# EAGLE board CT_schematic (EAGLE 7.6.0)

Size 100 x 80 mm. Coordinates in mm from the lower left corner, seen from the top.
Outline: 0,0 100,0 100,80 0,80 0,0
Copper layers (1*16): Top 0.035mm / dielectric 1.5mm / Bottom 0.035mm
Design rules "default": minimum track width 10mil, minimum drill 24mil, track to track 8mil, track to pad 8mil, pad to pad 8mil, via to via 8mil, smd to smd 8mil, copper to edge 40mil, drill to drill 8mil, minimum pad ring 10mil, minimum via ring 8mil, stop-mask expansion 4mil, vias tented up to drill 0mil, thermal gap 10mil

## Footprints (pad centres in the part's own frame; a part is rotated, then mirrored left to right if it is on the bottom)
C0603 = smd 0.8 x 0.8: 1 -0.762,0; 2 0.762,0
C0402 = smd 0.5 x 0.5: 1 -0.508,0; 2 0.508,0
R0603 = smd 0.8 x 0.8: 1 -0.762,0; 2 0.762,0
C0805 = smd 1.2 x 1.3: 1 -1.016,0; 2 1.016,0
2220 = smd 1.85 x 5.5: 1 -2.55,0; 2 2.55,0
EXV-9H = smd 3.505 x 1.676: 1 -2.857,0; 2 2.857,0
L0603 = smd 0.8 x 0.8: 1 -0.762,0; 2 0.762,0
DR1040 = smd 1.6 x 3.2: 1 -4.458,0; 2 4.458,0
PJ-037B_PACKAGE = drill 3.7 square: 1 12,0 | drill 3.2 square: 2 6,0
LQFP176 = smd 0.3 x 1.2: 1 -10.75,-12.75; 2 -10.25,-12.75; 3 -9.75,-12.75; 4 -9.25,-12.75; 5 -8.75,-12.75; 6 -8.25,-12.75; 7 -7.75,-12.75; 8 -7.25,-12.75; 9 -6.75,-12.75; 10 -6.25,-12.75; 11 -5.75,-12.75; 12 -5.25,-12.75; 13 -4.75,-12.75; 14 -4.25,-12.75; 15 -3.75,-12.75; 16 -3.25,-12.75; 17 -2.75,-12.75; 18 -2.25,-12.75; 19 -1.75,-12.75; 20 -1.25,-12.75; 21 -0.75,-12.75; 22 -0.25,-12.75; 23 0.25,-12.75; 24 0.75,-12.75; 25 1.25,-12.75; 26 1.75,-12.75; 27 2.25,-12.75; 28 2.75,-12.75; 29 3.25,-12.75; 30 3.75,-12.75; 31 4.25,-12.75; 32 4.75,-12.75; 33 5.25,-12.75; 34 5.75,-12.75; 35 6.25,-12.75; 36 6.75,-12.75; 37 7.25,-12.75; 38 7.75,-12.75; 39 8.25,-12.75; 40 8.75,-12.75; 41 9.25,-12.75; 42 9.75,-12.75; 43 10.25,-12.75; 44 10.75,-12.75; 89 10.75,12.75; 90 10.25,12.75; 91 9.75,12.75; 92 9.25,12.75; 93 8.75,12.75; 94 8.25,12.75; 95 7.75,12.75; 96 7.25,12.75; 97 6.75,12.75; 98 6.25,12.75; 99 5.75,12.75; 100 5.25,12.75; 101 4.75,12.75; 102 4.25,12.75; 103 3.75,12.75; 104 3.25,12.75; 105 2.75,12.75; 106 2.25,12.75; 107 1.75,12.75; 108 1.25,12.75; 109 0.75,12.75; 110 0.25,12.75; 111 -0.25,12.75; 112 -0.75,12.75; 113 -1.25,12.75; 114 -1.75,12.75; 115 -2.25,12.75; 116 -2.75,12.75; 117 -3.25,12.75; 118 -3.75,12.75; 119 -4.25,12.75; 120 -4.75,12.75; 121 -5.25,12.75; 122 -5.75,12.75; 123 -6.25,12.75; 124 -6.75,12.75; 125 -7.25,12.75; 126 -7.75,12.75; 127 -8.25,12.75; 128 -8.75,12.75; 129 -9.25,12.75; 130 -9.75,12.75; 131 -10.25,12.75; 132 -10.75,12.75 | smd 1.2 x 0.3: 45 12.75,-10.75; 46 12.75,-10.25; 47 12.75,-9.75; 48 12.75,-9.25; 49 12.75,-8.75; 50 12.75,-8.25; 51 12.75,-7.75; 52 12.75,-7.25; 53 12.75,-6.75; 54 12.75,-6.25; 55 12.75,-5.75; 56 12.75,-5.25; 57 12.75,-4.75; 58 12.75,-4.25; 59 12.75,-3.75; 60 12.75,-3.25; 61 12.75,-2.75; 62 12.75,-2.25; 63 12.75,-1.75; 64 12.75,-1.25; 65 12.75,-0.75; 66 12.75,-0.25; 67 12.75,0.25; 68 12.75,0.75; 69 12.75,1.25; 70 12.75,1.75; 71 12.75,2.25; 72 12.75,2.75; 73 12.75,3.25; 74 12.75,3.75; 75 12.75,4.25; 76 12.75,4.75; 77 12.75,5.25; 78 12.75,5.75; 79 12.75,6.25; 80 12.75,6.75; 81 12.75,7.25; 82 12.75,7.75; 83 12.75,8.25; 84 12.75,8.75; 85 12.75,9.25; 86 12.75,9.75; 87 12.75,10.25; 88 12.75,10.75; 133 -12.75,10.75; 134 -12.75,10.25; 135 -12.75,9.75; 136 -12.75,9.25; 137 -12.75,8.75; 138 -12.75,8.25; 139 -12.75,7.75; 140 -12.75,7.25; 141 -12.75,6.75; 142 -12.75,6.25; 143 -12.75,5.75; 144 -12.75,5.25; 145 -12.75,4.75; 146 -12.75,4.25; 147 -12.75,3.75; 148 -12.75,3.25; 149 -12.75,2.75; 150 -12.75,2.25; 151 -12.75,1.75; 152 -12.75,1.25; 153 -12.75,0.75; 154 -12.75,0.25; 155 -12.75,-0.25; 156 -12.75,-0.75; 157 -12.75,-1.25; 158 -12.75,-1.75; 159 -12.75,-2.25; 160 -12.75,-2.75; 161 -12.75,-3.25; 162 -12.75,-3.75; 163 -12.75,-4.25; 164 -12.75,-4.75; 165 -12.75,-5.25; 166 -12.75,-5.75; 167 -12.75,-6.25; 168 -12.75,-6.75; 169 -12.75,-7.25; 170 -12.75,-7.75; 171 -12.75,-8.25; 172 -12.75,-8.75; 173 -12.75,-9.25; 174 -12.75,-9.75; 175 -12.75,-10.25; 176 -12.75,-10.75
SOT-23-6 = smd 1.1 x 0.6: 1 -1.4,0.95; 2 -1.4,0; 3 -1.4,-0.95; 4 1.4,-0.95; 5 1.4,0; 6 1.4,0.95
ARDUCAM = drill 1 pad 1.8 square: 1 0,0 | drill 1 pad 1.8: 2 0,2.54; 3 2.54,0; 4 2.54,2.54; 5 5.08,0; 6 5.08,2.54; 7 7.62,0; 8 7.62,2.54; 9 10.16,0; 10 10.16,2.54; 11 12.7,0; 12 12.7,2.54; 13 15.24,0; 14 15.24,2.54; 15 17.78,0; 16 17.78,2.54; 17 20.32,0; 18 20.32,2.54; 19 22.86,0; 20 22.86,2.54
VFBGA-63 = smd 0.4 x 0.4: A1 -3.6,4.4; A2 -2.8,4.4; A9 2.8,4.4; A10 3.6,4.4; B1 -3.6,3.6; B9 2.8,3.6; B10 3.6,3.6; C3 -2,2.8; C4 -1.2,2.8; C5 -0.4,2.8; C6 0.4,2.8; C7 1.2,2.8; C8 2,2.8; D3 -2,2; D4 -1.2,2; D5 -0.4,2; D6 0.4,2; D7 1.2,2; D8 2,2; E3 -2,1.2; E4 -1.2,1.2; E5 -0.4,1.2; E6 0.4,1.2; E7 1.2,1.2; E8 2,1.2; F3 -2,0.4; F4 -1.2,0.4; F5 -0.4,0.4; F6 0.4,0.4; F7 1.2,0.4; F8 2,0.4; G3 -2,-0.4; G4 -1.2,-0.4; G5 -0.4,-0.4; G6 0.4,-0.4; G7 1.2,-0.4; G8 2,-0.4; H3 -2,-1.2; H4 -1.2,-1.2; H5 -0.4,-1.2; H6 0.4,-1.2; H7 1.2,-1.2; H8 2,-1.2; J3 -2,-2; J4 -1.2,-2; J5 -0.4,-2; J6 0.4,-2; J7 1.2,-2; J8 2,-2; K3 -2,-2.8; K4 -1.2,-2.8; K5 -0.4,-2.8; K6 0.4,-2.8; K7 1.2,-2.8; K8 2,-2.8; L1 -3.6,-3.6; L2 -2.8,-3.6; L9 2.8,-3.6; L10 3.6,-3.6; M1 -3.6,-4.4; M2 -2.8,-4.4; M9 2.8,-4.4; M10 3.6,-4.4
SON-8 = smd 0.35 x 0.85: 1 -0.975,-1.475; 2 -0.325,-1.475; 3 0.325,-1.475; 4 0.975,-1.475; 5 0.975,1.475; 6 0.325,1.475; 7 -0.325,1.475; 8 -0.975,1.475 | smd 2.4 x 1.65: PAD 0,0
SOIC-8 = smd 1.6 x 0.6: 1 -2.7,1.905 | smd 1.55 x 0.6: 2 -2.7,0.635; 3 -2.7,-0.635; 4 -2.7,-1.905; 5 2.7,-1.905; 6 2.7,-0.635; 7 2.7,0.635; 8 2.7,1.905
182-009-MALE = drill 1.194 pad 1.524 octagon: 1 -5.537,10.923; 2 -2.769,10.923; 3 0,10.923; 4 2.769,10.923; 5 5.537,10.923; 6 -4.153,8.08; 7 -1.384,8.08; 8 1.384,8.08; 9 4.153,8.08 | hole 3.048: -12.446,9.501; 12.446,9.501
MICRO_USB_AB = smd 0.4 x 1.35: 1 1.3,0.26; 2 0.65,0.26; 3 0,0.26; 4 -0.65,0.26; 5 -1.3,0.26 | drill 0.6 pad 0.95 long: 6 4.175,-2.54; 7 -4.175,-2.54 | drill 0.7 pad 1.1 long: 8 -2.225,0.46; 9 2.225,0.46
SOT143B = smd 1 x 0.7: 1 -0.75,-1 | smd 0.6 x 0.7: 2 0.95,-1; 3 0.95,1; 4 -0.95,1
QFN-24 = smd 0.7 x 0.305: 1 -1.815,1.25; 2 -1.815,0.75; 3 -1.815,0.25; 4 -1.815,-0.25; 5 -1.815,-0.73; 6 -1.815,-1.25; 13 1.815,-1.25; 14 1.815,-0.75; 15 1.815,-0.25; 16 1.815,0.25; 17 1.815,0.75; 18 1.815,1.25 | smd 0.305 x 0.7: 7 -1.25,-1.815; 8 -0.75,-1.815; 9 -0.25,-1.815; 10 0.25,-1.815; 11 0.75,-1.815; 12 1.25,-1.815; 19 1.25,1.815; 20 0.75,1.815; 21 0.25,1.815; 22 -0.25,1.815; 23 -0.75,1.815; 24 -1.25,1.815 | smd 2.591 x 2.591: 25 0,0
USB-A-H = drill 0.914: 1 2.718,3.493; 2 2.718,1.003; 3 2.718,-1.003; 4 2.718,-3.493 | drill 2.311: 5 0,-6.566; 6 0,6.566
ABS07-32.768KHZ-7-T = smd 1.1 x 2.4: 1 -2.5,0; 2 0,0
ASEK = smd 1.4 x 1: 1 -1.1,-0.8; 2 1.1,-0.8; 3 1.1,0.8; 4 -1.1,0.8
ASFL1 = smd 1.7 x 1.5: 1 -1.27,-1.1; 2 1.27,-1.1; 3 1.27,1.1; 4 -1.27,1.1
IDT74FCT38072 = smd 0.51 x 1: 1 0,0; 2 1.27,0; 3 2.54,0; 4 3.81,0; 5 3.81,4.95; 6 2.54,4.95; 7 1.27,4.95; 8 0,4.95
WSON-8 = smd 0.3 x 0.6: 1 -0.75,0; 2 0.05,0; 3 0.85,0; 4 1.65,0; 5 1.65,3.8; 6 0.85,3.8; 7 0.05,3.8; 8 -0.75,3.8 | smd 3 x 2.6: PAD 0.45,1.9
QFN-16_EP = smd 0.805 x 0.3: 1 -1.452,0.75; 2 -1.452,0.25; 3 -1.452,-0.25; 4 -1.452,-0.75; 9 1.452,-0.75; 10 1.452,-0.25; 11 1.452,0.25; 12 1.452,0.75 | smd 0.3 x 0.805: 5 -0.75,-1.452; 6 -0.25,-1.452; 7 0.25,-1.452; 8 0.75,-1.452; 13 0.75,1.452; 14 0.25,1.452; 15 -0.25,1.452; 16 -0.75,1.452 | smd 1.55 x 1.55: 17 0,0
SON-6 = smd 0.55 x 0.3: 1 -0.355,0.5 | smd 0.52 x 0.3: 2 -0.37,0; 3 -0.37,-0.5; 4 0.37,-0.5; 5 0.37,0; 6 0.37,0.5
SW_4-1437565-2 = smd 1.4 x 2.1: 1 -2.23,4.55; 2 -2.23,-4.55; 3 2.23,4.55; 4 2.23,-4.55
LGM67K-G1J2-24-Z = smd 0.8 x 1.4: A -2,0; C 0,0
NC7SZ125M5X = smd 1.3 x 0.7: 1 -1.3,0.95; 2 -1.3,0; 3 -1.3,-0.95; 4 1.3,-0.95; 5 1.3,0.95

## Placement (x,y rotation side)
C1  1e-06  [C0603]  -83.82,88.9 0 top  (outside the outline)
C2  1e-07  [C0603]  -87.63,88.9 0 top  (outside the outline)
C3  1e-07  [C0603]  -91.44,88.9 0 top  (outside the outline)
C4  1e-07  [C0603]  -15.24,93.98 0 top  (outside the outline)
C5  1e-07  [C0603]  -19.05,93.98 0 top  (outside the outline)
C6  1e-07  [C0603]  -22.86,93.98 0 top  (outside the outline)
C7  1e-07  [C0603]  -26.67,93.98 0 top  (outside the outline)
C8  1e-07  [C0603]  -30.48,93.98 0 top  (outside the outline)
C9  1e-07  [C0603]  -34.29,93.98 0 top  (outside the outline)
C10  1e-07  [C0603]  -38.1,93.98 0 top  (outside the outline)
C11  1e-07  [C0603]  -41.91,93.98 0 top  (outside the outline)
C12  1e-07  [C0603]  -45.72,93.98 0 top  (outside the outline)
C13  1e-07  [C0603]  -49.53,93.98 0 top  (outside the outline)
C14  1e-07  [C0603]  -53.34,93.98 0 top  (outside the outline)
C15  1e-07  [C0603]  -57.15,93.98 0 top  (outside the outline)
C16  1e-07  [C0603]  -60.96,93.98 0 top  (outside the outline)
C17  1e-07  [C0603]  -64.77,93.98 0 top  (outside the outline)
C18  4.7e-06  [C0603]  -64.77,88.9 0 top  (outside the outline)
C19  1e-08  [C0603]  -68.58,93.98 0 top  (outside the outline)
C20  1e-06  [C0603]  -72.39,93.98 0 top  (outside the outline)
C21  2.2e-06  [C0603]  -68.58,88.9 0 top  (outside the outline)
C22  2.2e-06  [C0603]  -72.39,88.9 0 top  (outside the outline)
C23  1e-06  [C0603]  -76.2,93.98 0 top  (outside the outline)
C24  1e-07  [C0402]  -67.31,99.06 0 top  (outside the outline)
C25  1e-07  [C0402]  -71.12,99.06 0 top  (outside the outline)
C26  1e-07  [C0402]  -74.93,99.06 0 top  (outside the outline)
C27  1e-07  [C0402]  -78.74,99.06 0 top  (outside the outline)
C28  2.2e-06  [C0603]  -76.2,88.9 0 top  (outside the outline)
C29  1e-07  [C0402]  -82.55,99.06 0 top  (outside the outline)
C30  1e-07  [C0402]  -86.36,99.06 0 top  (outside the outline)
C31  1e-08  [C0402]  -90.17,99.06 0 top  (outside the outline)
C32  2.2e-06  [C0603]  -80.01,88.9 0 top  (outside the outline)
C33  1e-08  [C0402]  -93.98,99.06 0 top  (outside the outline)
C34  1e-08  [C0402]  -15.24,104.14 0 top  (outside the outline)
C35  0.0001  [R0603]  -80.01,93.98 0 top  (outside the outline)
C36  1e-08  [C0402]  -19.05,104.14 0 top  (outside the outline)
C37  1e-08  [C0402]  -22.86,104.14 0 top  (outside the outline)
C38  1e-08  [C0402]  -26.67,104.14 0 top  (outside the outline)
C39  1e-08  [C0402]  -30.48,104.14 0 top  (outside the outline)
C40  1e-06  [C0603]  -83.82,93.98 0 top  (outside the outline)
C41  1e-05  [C0805]  -69.85,76.2 0 top  (outside the outline)
C42  1e-05  [C0805]  -74.93,76.2 0 top  (outside the outline)
C43  1e-06  [C0603]  -87.63,93.98 0 top  (outside the outline)
C44  1e-07  [C0402]  -34.29,104.14 0 top  (outside the outline)
C45  6.8e-05  [2220]  -54.61,50.8 0 top  (outside the outline)
C46  1e-05  [C0805]  -80.01,76.2 0 top  (outside the outline)
C47  1e-06  [C0603]  -91.44,93.98 0 top  (outside the outline)
C48  1e-07  [C0402]  -38.1,104.14 0 top  (outside the outline)
C49  6.8e-05  [2220]  -62.23,50.8 0 top  (outside the outline)
C50  1e-07  [C0402]  -41.91,104.14 0 top  (outside the outline)
C51  0.0001  [EXV-9H]  -17.78,69.85 0 top  (outside the outline)
C52  0.0001  [EXV-9H]  -29.21,69.85 0 top  (outside the outline)
C53  1e-08  [C0402]  -45.72,104.14 0 top  (outside the outline)
C54  1e-08  [C0402]  -49.53,104.14 0 top  (outside the outline)
C55  1e-08  [C0402]  -53.34,104.14 0 top  (outside the outline)
F1  240.0  [L0603]  -15.24,99.06 0 top  (outside the outline)
I1  2.5e-06  [DR1040]  -19.05,50.8 0 top  (outside the outline)
I2  2.5e-06  [DR1040]  -30.48,50.8 0 top  (outside the outline)
J1  PJ-037B  [PJ-037B_PACKAGE]  -44.45,34.29 0 top  (outside the outline)
R2  1000.0  [R0603]  -19.05,99.06 0 top  (outside the outline)
R7  4700.0  [R0603]  -22.86,99.06 0 top  (outside the outline)
R8  4700.0  [R0603]  -26.67,99.06 0 top  (outside the outline)
R9  4700.0  [R0603]  -30.48,99.06 0 top  (outside the outline)
R10  2200.0  [R0603]  -34.29,99.06 0 top  (outside the outline)
R12  2200.0  [R0603]  -38.1,99.06 0 top  (outside the outline)
R14  47000.0  [R0603]  -45.72,83.82 0 top  (outside the outline)
R15  10000.0  [R0603]  -50.8,83.82 0 top  (outside the outline)
R16  10000.0  [R0603]  -55.88,83.82 0 top  (outside the outline)
R17  10000.0  [R0603]  -60.96,83.82 0 top  (outside the outline)
R18  10000.0  [R0603]  -66.04,83.82 0 top  (outside the outline)
R19  10000.0  [R0603]  -71.12,83.82 0 top  (outside the outline)
R20  10000.0  [R0603]  -76.2,83.82 0 top  (outside the outline)
R21  10000.0  [R0603]  -81.28,83.82 0 top  (outside the outline)
R22  10000.0  [R0603]  -86.36,83.82 0 top  (outside the outline)
R23  10000.0  [R0603]  -91.44,83.82 0 top  (outside the outline)
R24  10000.0  [R0603]  -15.24,88.9 0 top  (outside the outline)
R25  10000.0  [R0603]  -20.32,88.9 0 top  (outside the outline)
R26  10000.0  [R0603]  -25.4,88.9 0 top  (outside the outline)
R27  120.0  [R0603]  -41.91,99.06 0 top  (outside the outline)
R28  470000.0  [R0603]  -85.09,76.2 0 top  (outside the outline)
R29  47000.0  [R0603]  -30.48,88.9 0 top  (outside the outline)
R30  8060.0  [R0603]  -45.72,99.06 0 top  (outside the outline)
R31  100000.0  [R0603]  -90.17,76.2 0 top  (outside the outline)
R32  36000.0  [R0603]  -35.56,88.9 0 top  (outside the outline)
R33  100000.0  [R0603]  -15.24,83.82 0 top  (outside the outline)
R34  20000.0  [R0603]  -40.64,88.9 0 top  (outside the outline)
R35  91000.0  [R0603]  -45.72,88.9 0 top  (outside the outline)
R36  300000.0  [R0603]  -20.32,83.82 0 top  (outside the outline)
R37  20000.0  [R0603]  -50.8,88.9 0 top  (outside the outline)
R38  150000.0  [R0603]  -25.4,83.82 0 top  (outside the outline)
R39  300000.0  [R0603]  -30.48,83.82 0 top  (outside the outline)
R40  10000.0  [R0603]  -55.88,88.9 0 top  (outside the outline)
R41  10000.0  [R0603]  -60.96,88.9 0 top  (outside the outline)
R42  9100.0  [R0603]  -49.53,99.06 0 top  (outside the outline)
R43  680000.0  [R0603]  -35.56,83.82 0 top  (outside the outline)
R44  120000.0  [R0603]  -40.64,83.82 0 top  (outside the outline)
U1  STM32F439IGT6  [LQFP176]  -26.67,13.97 0 top  (outside the outline)
U2  MAX4995AAUT+T  [SOT-23-6]  -45.72,76.2 0 top  (outside the outline)
U3  arducam_ov2640  [ARDUCAM]  -82.55,67.31 0 top  (outside the outline)
U4  mt29f4g08abadah4  [VFBGA-63]  -50.8,34.29 0 top  (outside the outline)
U5  PCF85063TP/1Z  [SON-8]  -27.94,76.2 0 top  (outside the outline)
U6  SN65HVD230D  [SOIC-8]  -45.72,50.8 0 top  (outside the outline)
U7  182-009-113R531  [182-009-MALE]  -63.5,6.35 0 top  (outside the outline)
U8  47590-0001  [MICRO_USB_AB]  -63.5,35.56 0 top  (outside the outline)
U9  prtr5v0u2ax  [SOT143B]  -66.04,104.14 0 top  (outside the outline)
U10  USB3317C-CP-TR  [QFN-24]  -33.02,77.47 0 top  (outside the outline)
U11  61400416021  [USB-A-H]  -19.05,36.83 0 top  (outside the outline)
U12  prtr5v0u2ax  [SOT143B]  -78.74,104.14 0 top  (outside the outline)
U13  MAX4995AAUT+T  [SOT-23-6]  -40.64,76.2 0 top  (outside the outline)
U14  ABS07-32.768KHZ-7-T  [ABS07-32.768KHZ-7-T]  -50.8,69.85 0 top  (outside the outline)
U15  ASEK-32.768KHz-ECST  [ASEK]  -81.28,60.96 0 top  (outside the outline)
U16  ASFL1-25MHZ-NCS  [ASFL1]  -26.67,60.96 0 top  (outside the outline)
U17  idt74fct38072  [IDT74FCT38072]  -63.5,58.42 0 top  (outside the outline)
U18  ASFL1-26MHZ-NCS  [ASFL1]  -43.18,60.96 0 top  (outside the outline)
U19  LP2951ACSDX/NOPB  [WSON-8]  -81.28,48.26 0 top  (outside the outline)
U20  LTC3601EUD#PBF  [QFN-16_EP]  -54.61,99.06 0 top  (outside the outline)
U21  LTC3601EUD#PBF  [QFN-16_EP]  -60.96,99.06 0 top  (outside the outline)
U22  TPS3895ADRYR  [SON-6]  -82.55,102.87 0 top  (outside the outline)
U23  4-1437565-2  [SW_4-1437565-2]  -83.82,34.29 0 top  (outside the outline)
U24  Q65110A2395  [LGM67K-G1J2-24-Z]  -17.78,77.47 0 top  (outside the outline)
U25  nc7sz125m5x  [NC7SZ125M5X]  -50.8,76.2 0 top  (outside the outline)
U26  nc7sz125m5x  [NC7SZ125M5X]  -57.15,76.2 0 top  (outside the outline)
U27  nc7sz125m5x  [NC7SZ125M5X]  -63.5,76.2 0 top  (outside the outline)

## Library data of the parts
C1-C55 F1 I1 I2 J1 R2 R7-R10 R12 R14-R44 U1-U27 = circuit_tree

## Nets
CLK_CRYSTAL_U5_1: U5.1 U14.1
CLK_CRYSTAL_U5_2: U5.2 U14.2
CLK_U1_9: U1.9 U15.3
CLK_U1_29: U1.29 U17.6
CLK_U3_8: U3.8 U17.7
CLK_U10_23: U10.23 U18.3
CLK_U17_3: U16.3 U17.3
GND: C1.2 C2.2 C3.2 C4.2 C5.2 C6.2 C7.2 C8.2 C9.2 C10.2 C11.2 C12.2 C13.2 C14.2 C15.2 C16.2 C17.2 C18.2 C19.2 C20.2 C21.2 C22.2 C23.2 C24.2 C25.2 C26.2 C27.2 C28.2 C29.2 C30.2 C31.2 C32.2 C33.2 C34.2 C35.2 C36.2 C37.2 C38.2 C39.2 C40.2 C41.2 C42.2 C43.2 C45.1 C45.2 C46.2 C47.2 C49.1 C49.2 C50.2 C51.2 C52.2 C53.2 C54.2 C55.2 J1.2 R2.2 R14.2 R18.2 R20.2 R28.2 R29.2 R30.2 R33.2 R34.2 R36.2 R37.2 R39.2 R42.2 R44.2 U1.14 U1.22 U1.37 U1.61 U1.71 U1.90 U1.102 U1.113 U1.126 U1.135 U1.148 U1.158 U2.2 U3.2 U3.20 U4.C5 U4.F7 U4.K3 U4.K8 U5.4 U5.PAD U6.2 U7.5 U8.5 U8.6 U8.7 U8.8 U8.9 U9.1 U10.1 U10.25 U11.4 U11.5 U11.6 U12.1 U13.2 U15.2 U16.2 U17.4 U17.5 U17.8 U18.2 U19.3 U19.4 U19.PAD U20.1 U20.9 U20.17 U21.1 U21.9 U21.17 U22.2 U24.C U25.1 U25.3 U26.1 U26.3 U27.1 U27.3
NET_U1_31: R7.1 U1.31 U25.4
NET_U1_39: C19.1 C20.1 F1.1 U1.38 U1.39
NET_U1_48: R18.1 U1.48
NET_U1_58: R17.1 U1.58
NET_U1_81: C21.1 U1.81
NET_U1_125: C22.1 U1.125
NET_U1_164: R10.1 U1.164 U5.6
NET_U1_165: R12.1 U1.165 U5.5
NET_U1_166: R16.1 U1.166
NET_U1_171: R15.1 U1.171
NET_U1_175: U24.A
NET_U1_176: U23.3 U23.4
NET_U2_3: R14.1 U2.3
NET_U3_19: R8.1 U3.19 U26.4
NET_U4_C3: R25.1 U4.C3
NET_U5_3: R26.1 U5.3
NET_U6_6: R27.2 U6.6
NET_U6_8: R28.1 U6.8
NET_U7_2: R27.2 U6.6 U7.2
NET_U7_3: R27.1 U6.7 U7.3
NET_U10_4: C32.1 U10.4
NET_U10_22: R9.1 U10.22 U27.4
NET_U10_24: R30.1 U10.24
NET_U11_1: C35.1 U10.2 U11.1 U12.4 U13.1
NET_U11_2: U10.5 U11.2 U12.3
NET_U11_3: U10.6 U11.3 U12.2
NET_U13_3: R29.1 U13.3
NET_U13_4: U10.7 U13.4
NET_U19_5: R31.1 U19.5
NET_U19_7: R32.2 R33.1 U19.7
NET_U20_3: C44.2 I1.1 U20.3 U20.4
NET_U20_6: C44.1 U20.6
NET_U20_7: C43.1 U20.7 U20.12
NET_U20_10: R36.1 U20.10
NET_U20_11: R34.1 R35.1 U20.11
NET_U20_14: U20.14
NET_U20_ATNET_3: I1.2 R35.2
NET_U21_3: C48.2 I2.1 U21.3 U21.4
NET_U21_6: C48.1 U21.6
NET_U21_7: C47.1 U21.7 U21.12
NET_U21_10: R39.1 U21.10
NET_U21_11: R37.1 R38.1 U21.11
NET_U21_14: U21.14
NET_U21_ATNET_3: I2.2 R38.2
NET_U22_1: R41.1 R42.1 U22.1
NET_U22_3: R43.2 R44.1 U22.3
NET_U22_4: R40.1 U22.4 U25.2 U26.2 U27.2
NET_U23_1: R2.1 U23.1 U23.2
PROC_CAN1_RX: U1.11 U6.4
PROC_CAN1_TX: U1.128 U6.1
PROC_DCMI_D0: U1.86 U3.18
PROC_DCMI_D1: U1.87 U3.17
PROC_DCMI_D2: U1.88 U3.16
PROC_DCMI_D3: U1.89 U3.15
PROC_DCMI_D4: U1.3 U3.14
PROC_DCMI_D5: U1.145 U3.13
PROC_DCMI_D6: U1.4 U3.12
PROC_DCMI_D7: U1.5 U3.11
PROC_DCMI_D8: U1.83 U3.10
PROC_DCMI_D9: U1.84 U3.9
PROC_DCMI_HSYNC: U1.50 U3.6
PROC_DCMI_PIXCK: U1.52 U3.7
PROC_DCMI_VSYNC: U1.152 U3.5
PROC_FMC_A16: U1.99 U4.D5
PROC_FMC_A17: U1.100 U4.C4
PROC_FMC_D0: U1.104 U4.H4
PROC_FMC_D1: U1.105 U4.J4
PROC_FMC_D2: U1.142 U4.K4
PROC_FMC_D3: U1.143 U4.K5
PROC_FMC_D4: U1.68 U4.K6
PROC_FMC_D5: U1.69 U4.J7
PROC_FMC_D6: U1.70 U4.K7
PROC_FMC_D7: U1.73 U4.J8
PROC_FMC_INT2: R21.1 U1.110 U4.C8
PROC_FMC_NCE2: R22.1 U1.151 U4.C6
PROC_FMC_NOE: R24.1 U1.146 U4.D4
PROC_FMC_NWE: R23.1 U1.147 U4.C7
PROC_GPIO_TO_U1_USB_FAULT: R19.1 U1.2 U2.6
PROC_GPIO_TO_U1_VBUS_EN: R20.1 U1.1 U2.4
PROC_USB_OTG_FS_DM: U8.2 U9.3
PROC_USB_OTG_FS_DP: U8.3 U9.2
PROC_USB_OTG_FS_ID: U8.4
PROC_USB_OTG_FS_VBUS: U2.1 U8.1 U9.4
PROC_USB_OTG_HS_ULPI_CK: U1.51 U10.12
PROC_USB_OTG_HS_ULPI_D0: U1.47 U10.16
PROC_USB_OTG_HS_ULPI_D1: U1.56 U10.15
PROC_USB_OTG_HS_ULPI_D2: U1.57 U10.14
PROC_USB_OTG_HS_ULPI_D3: U1.79 U10.13
PROC_USB_OTG_HS_ULPI_D4: U1.80 U10.11
PROC_USB_OTG_HS_ULPI_D5: U1.92 U10.10
PROC_USB_OTG_HS_ULPI_D6: U1.93 U10.9
PROC_USB_OTG_HS_ULPI_D7: U1.163 U10.8
PROC_USB_OTG_HS_ULPI_DIR: U1.13 U10.19
PROC_USB_OTG_HS_ULPI_NXT: U1.35 U10.18
PROC_USB_OTG_HS_ULPI_STP: U1.32 U10.20
VCC_S1_6V6: C40.1 C42.1 C46.1 C51.1 C52.1 J1.1 U19.8 U20.15 U20.16 U21.15 U21.16
VCC_TIER1_1V8: C34.1 C41.1 C53.1 C54.1 C55.1 R31.2 R32.1 U10.21 U19.1 U25.5 U26.5 U27.5
VCC_TIER1_3V3: C1.1 C2.1 C3.1 C4.1 C5.1 C6.1 C7.1 C8.1 C9.1 C10.1 C11.1 C12.1 C13.1 C14.1 C15.1 C16.1 C17.1 C18.1 C23.1 C24.1 C25.1 C26.1 C27.1 C28.1 C29.1 C30.1 C31.1 C33.1 C36.1 C37.1 C38.1 C39.1 C45.2 C50.1 F1.2 I1.2 R7.2 R8.2 R9.2 R10.2 R12.2 R15.2 R16.2 R17.2 R19.2 R21.2 R22.2 R23.2 R24.2 R25.2 R26.2 R35.2 R40.2 R41.2 R43.1 U1.6 U1.15 U1.23 U1.36 U1.49 U1.62 U1.72 U1.82 U1.91 U1.103 U1.114 U1.127 U1.136 U1.149 U1.159 U1.172 U3.1 U4.D3 U4.G4 U4.H8 U4.J6 U5.8 U6.3 U10.3 U10.17 U15.4 U16.4 U17.1 U17.2 U18.4 U20.8 U22.6
VCC_TIER1_5V0: C49.2 I2.2 R38.2 U2.5 U13.5 U21.8

## Tracks (layer width: path | path; a pad name or v marks a point on that pad's centre or on a via)
CLK_CRYSTAL_U5_1  (1 unrouted)
CLK_CRYSTAL_U5_2  (1 unrouted)
CLK_U1_9  (1 unrouted)
CLK_U1_29  (1 unrouted)
CLK_U3_8  (1 unrouted)
CLK_U10_23  (1 unrouted)
CLK_U17_3  (1 unrouted)
GND  (128 unrouted)
NET_U1_31  (2 unrouted)
NET_U1_39  (4 unrouted)
NET_U1_48  (1 unrouted)
NET_U1_58  (1 unrouted)
NET_U1_81  (1 unrouted)
NET_U1_125  (1 unrouted)
NET_U1_164  (2 unrouted)
NET_U1_165  (2 unrouted)
NET_U1_166  (1 unrouted)
NET_U1_171  (1 unrouted)
NET_U1_176  (1 unrouted)
NET_U2_3  (1 unrouted)
NET_U3_19  (2 unrouted)
NET_U4_C3  (1 unrouted)
NET_U5_3  (1 unrouted)
NET_U6_6  (1 unrouted)
NET_U6_8  (1 unrouted)
NET_U7_2  (2 unrouted)
NET_U7_3  (2 unrouted)
NET_U10_4  (1 unrouted)
NET_U10_22  (2 unrouted)
NET_U10_24  (1 unrouted)
NET_U11_1  (4 unrouted)
NET_U11_2  (2 unrouted)
NET_U11_3  (2 unrouted)
NET_U13_3  (1 unrouted)
NET_U13_4  (1 unrouted)
NET_U19_5  (1 unrouted)
NET_U19_7  (2 unrouted)
NET_U20_3  (3 unrouted)
NET_U20_6  (1 unrouted)
NET_U20_7  (2 unrouted)
NET_U20_10  (1 unrouted)
NET_U20_11  (2 unrouted)
NET_U20_ATNET_3  (1 unrouted)
NET_U21_3  (3 unrouted)
NET_U21_6  (1 unrouted)
NET_U21_7  (2 unrouted)
NET_U21_10  (1 unrouted)
NET_U21_11  (2 unrouted)
NET_U21_ATNET_3  (1 unrouted)
NET_U22_1  (2 unrouted)
NET_U22_3  (2 unrouted)
NET_U22_4  (4 unrouted)
NET_U23_1  (2 unrouted)
PROC_CAN1_RX  (1 unrouted)
PROC_CAN1_TX  (1 unrouted)
PROC_DCMI_D0  (1 unrouted)
PROC_DCMI_D1  (1 unrouted)
PROC_DCMI_D2  (1 unrouted)
PROC_DCMI_D3  (1 unrouted)
PROC_DCMI_D4  (1 unrouted)
PROC_DCMI_D5  (1 unrouted)
PROC_DCMI_D6  (1 unrouted)
PROC_DCMI_D7  (1 unrouted)
PROC_DCMI_D8  (1 unrouted)
PROC_DCMI_D9  (1 unrouted)
PROC_DCMI_HSYNC  (1 unrouted)
PROC_DCMI_PIXCK  (1 unrouted)
PROC_DCMI_VSYNC  (1 unrouted)
PROC_FMC_A16  (1 unrouted)
PROC_FMC_A17  (1 unrouted)
PROC_FMC_D0  (1 unrouted)
PROC_FMC_D1  (1 unrouted)
PROC_FMC_D2  (1 unrouted)
PROC_FMC_D3  (1 unrouted)
PROC_FMC_D4  (1 unrouted)
PROC_FMC_D5  (1 unrouted)
PROC_FMC_D6  (1 unrouted)
PROC_FMC_D7  (1 unrouted)
PROC_FMC_INT2  (2 unrouted)
PROC_FMC_NCE2  (2 unrouted)
PROC_FMC_NOE  (2 unrouted)
PROC_FMC_NWE  (2 unrouted)
PROC_GPIO_TO_U1_USB_FAULT  (2 unrouted)
PROC_GPIO_TO_U1_VBUS_EN  (2 unrouted)
PROC_USB_OTG_FS_DM  (1 unrouted)
PROC_USB_OTG_FS_DP  (1 unrouted)
PROC_USB_OTG_FS_VBUS  (2 unrouted)
PROC_USB_OTG_HS_ULPI_CK  (1 unrouted)
PROC_USB_OTG_HS_ULPI_D0  (1 unrouted)
PROC_USB_OTG_HS_ULPI_D1  (1 unrouted)
PROC_USB_OTG_HS_ULPI_D2  (1 unrouted)
PROC_USB_OTG_HS_ULPI_D3  (1 unrouted)
PROC_USB_OTG_HS_ULPI_D4  (1 unrouted)
PROC_USB_OTG_HS_ULPI_D5  (1 unrouted)
PROC_USB_OTG_HS_ULPI_D6  (1 unrouted)
PROC_USB_OTG_HS_ULPI_D7  (1 unrouted)
PROC_USB_OTG_HS_ULPI_DIR  (1 unrouted)
PROC_USB_OTG_HS_ULPI_NXT  (1 unrouted)
PROC_USB_OTG_HS_ULPI_STP  (1 unrouted)
VCC_S1_6V6  (10 unrouted)
VCC_TIER1_1V8  (11 unrouted)
VCC_TIER1_3V3  (86 unrouted)
VCC_TIER1_5V0  (5 unrouted)